# Altium PCB PCB1.PcbDoc (part 2 of 2)
Units mil, origin at the board's own origin, x right, y up, seen from the top; angles counter-clockwise.
Board outline 4250 x 4500 mil, 2 copper layers (Top Layer, Bottom Layer); 112 components, 121 nets, 412 pads, 86 vias.
Unrouted connection lines stored in the file: 20.
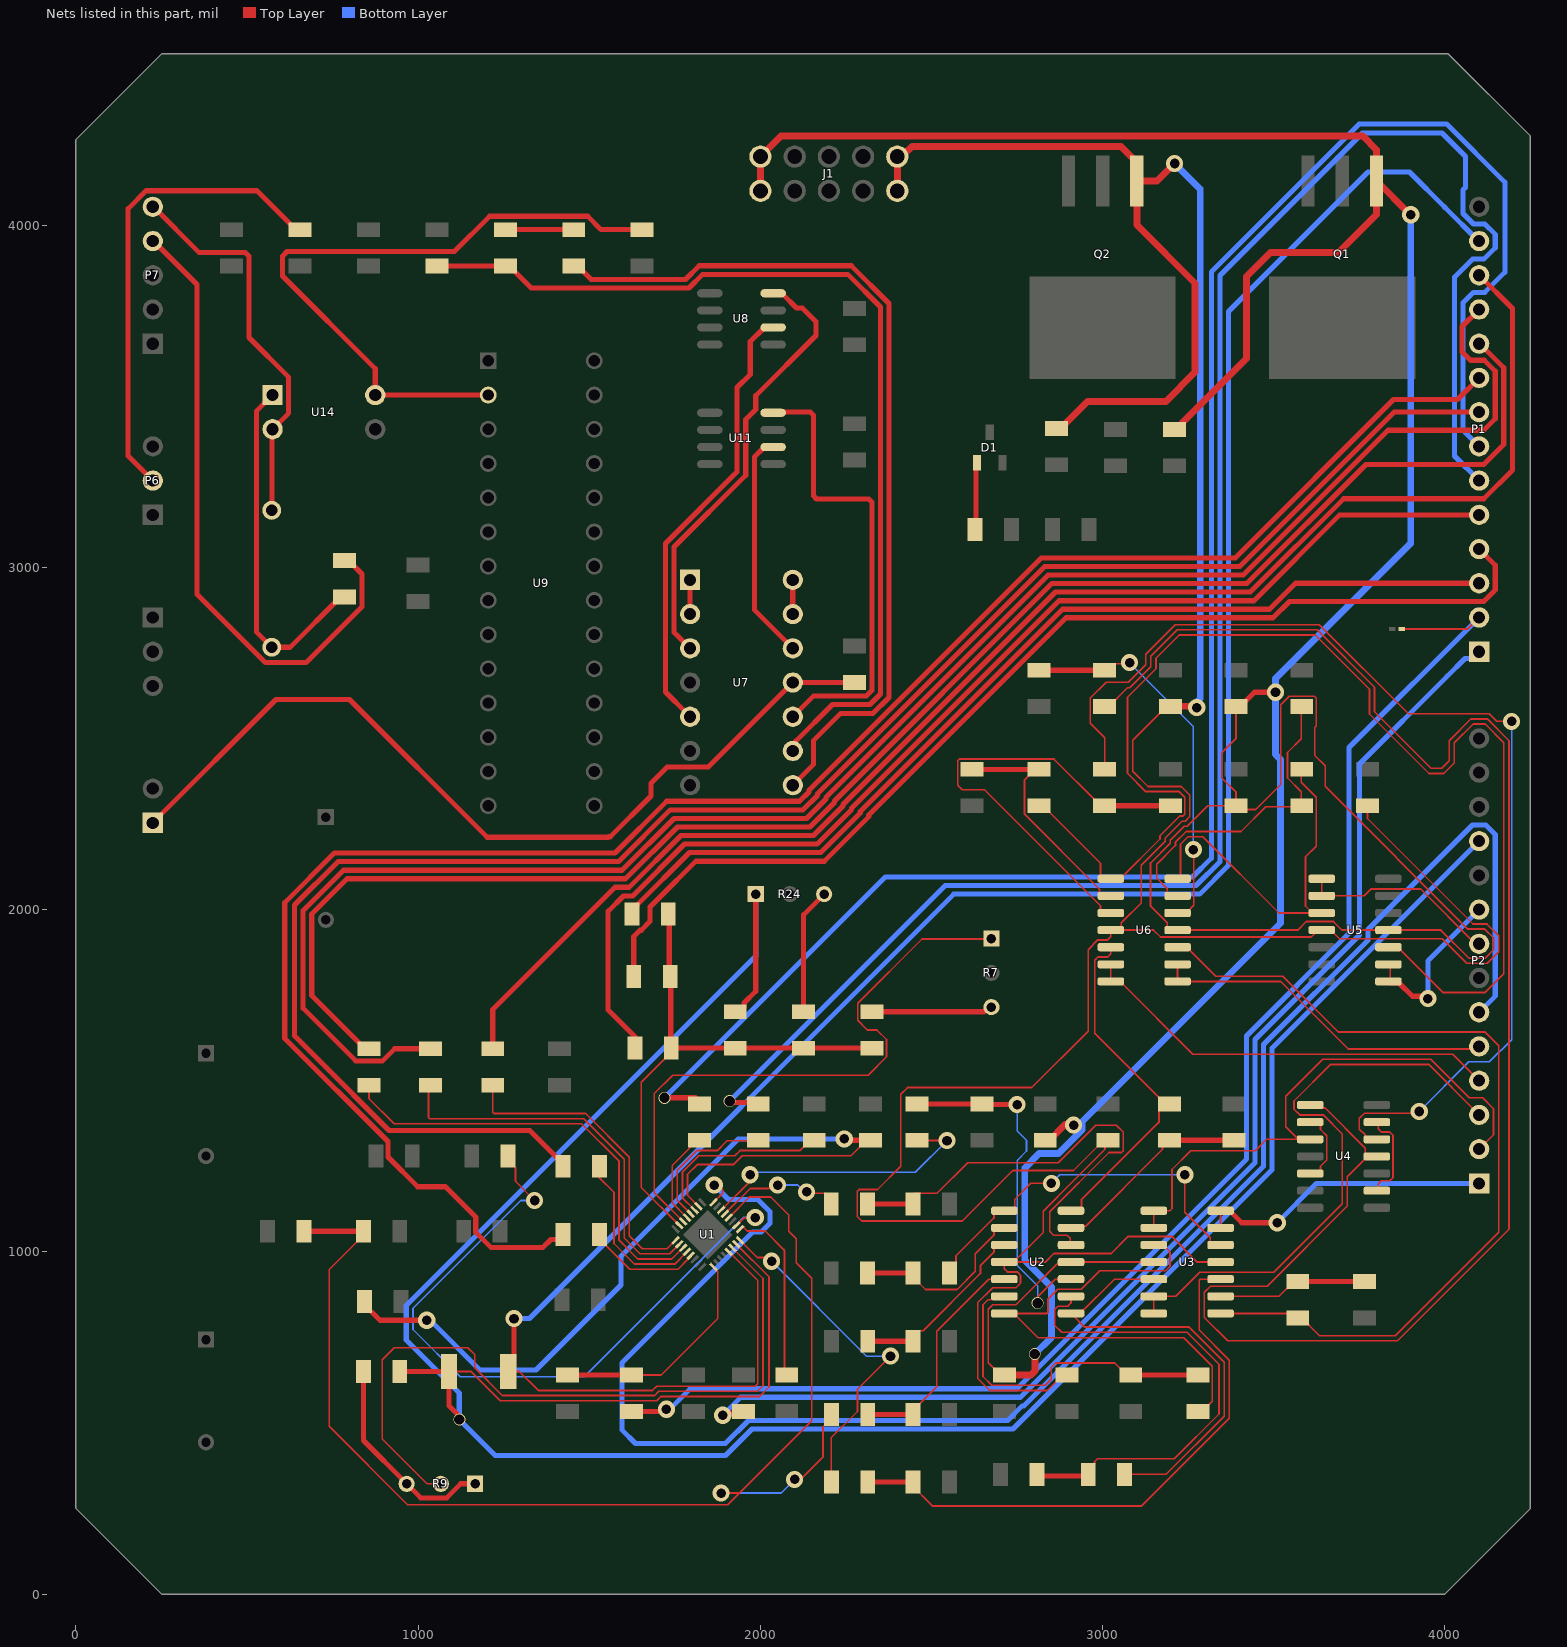
[diagram p2: the nets of this part, all layers, seen from the top]

## Via types
v1: diameter 50, hole 28, Top Layer to Bottom Layer, 79 vias
v2: diameter 35, hole 30, Top Layer to Bottom Layer, 7 vias

## Nets (pads, with @x,y where several pads share a name; then routed paths per layer and width w, separated by ;. In a path a pad name is that pad's centre, name@x,y a point inside that pad or via, vN(x,y) a via of type N, cw(c..) or ccw(c..) an arc to the next point about the centre after c; other vN are vias at no path point) (continued)
NetC9_2: C9.2 P1.1 | length 3702.8
  Top Layer w15: v1(1890,522.5) 1895.6,528.1 1944.89,528.1 C9.2@1950.49,533.7
  Bottom Layer w15: v1(1890,522.5) 1942.5,575 2759.64,575 3445,1260.36 3445,1620.36 3750,1925.36 3750,2425.1 4006.87,2681.98 4006.98,2681.98 4058.75,2733.75 4080.37,2733.75 P1.1@4100,2753.38
NetC10_1: C10.1 R13.2 U1.17 | length 666.8
  Top Layer w5: C10.1@1622.69,640 1710,640 1875,805 1875,942.42 1862.72,954.7 U1.17@1862.72,955.63
  Top Layer w15: R13.2@1435.83,640 C10.1@1626.3,640
NetC10_2: C10.2 P1.2 W1.2 | length 4209.4
  Top Layer w5: v1@1701.3,533.7 1718.7,533.7 v1(1725,540) ; W1.2@3873.78,2820 4066.62,2820 4090,2843.38 P1.2@4090,2860
  Top Layer w15: C10.2@1622.69,533.7 v1@1701.3,533.7
  Bottom Layer w15: v1(1725,540) 1735,540 1795,600 2749.29,600 3420,1270.71 3420,1630.71 3720,1930.71 3720,2473.38 P1.2@4100,2853.38
NetC13_2: C13.2 C18.2 C20.2 C22.2 C24.2 J1.1 J1.2 Q1.1 U2.11 U3.11 U5.11 U6.11 | length 11651.2
  Top Layer w5: C18.2@2700,650 2691.43,650 2665.28,676.15 2665.28,831.87 2678.41,845 2746.71,845 2770,868.29 2865.71,964 2901.44,964 U2.11@2907.44,970 ; U2.11@2925,970 U3.11@3149.51,970 ; U6.11@3210,1940 3197.49,1940 3188.44,1949.05 3188.44,1961.22 3140,2009.66 3140,2136.1 3197.5,2193.6 3197.5,2202.96 3237.82,2243.28 3247.18,2243.28 3307.34,2303.44 C24.2@3389.77,2303.44 3401.01,2292.19 3446.93,2292.19 3520,2365.26 3520,2598.22 3544.79,2623.01 3618.76,2623.01 3623.74,2618.03 3623.74,2535.88 3620,2532.15 3620,2450 3650,2420 3650,2360.07 4067.1,1942.97 4116.46,1942.97 4142.03,1917.41 4142.03,1882.59 4117.41,1857.97 4070.32,1857.97 3988.3,1940 U5.11@3834.88,1940 ; U6.11@3218.81,1940 3570,1940 3595,1965 3674.15,1965 3699.15,1940 U5.11@3820,1940 ; C22.2@3389.77,2592.86 3389.77,2500.11 3347.81,2458.15 3347.81,2384.56 3389.77,2342.6 3389.77,2310.23 C24.2@3390,2310
  Top Layer w15: C22.2@3389.77,2592.86 3401.58,2592.86 3443.73,2635 v1(3505,2635)
  Top Layer w20: J1.1@2000,4100 J1.2@2000,4200 2060,4260 3760,4260 3800,4220 Q1.1@3800,4183.46 ; C18.2@2713.24,640 2790.78,640 2802.5,651.72 2802.5,700.72 v2(2801.51,701.71) ; C20.2@2832.08,1325.94 2843.89,1325.94 2890,1372.05 ; C13.2@3210,3403.15 3221.81,3403.15 3233.46,3414.8 3233.46,3423.46 3420,3610 3420,3850 3490,3920 3688.76,3920 3800,4031.24 Q1.1@3800,4120 ; Q1.1@3800,4128.35 Q1.1@3800,4183.46 ; v1(3900,4030) 3899.49,4030 3800,4129.49 Q1.1@3800,4183.46
  Bottom Layer w20: v2(2801.51,701.71) 2850,750.21 2850,897.09 2772.5,974.59 2772.5,1245.53 2814.22,1287.25 2871.39,1287.25 2940,1355.86 2940,1370 ; v1(2915,1370) 2940,1370 ; v1@3501.88,2640 3505,2643.12 3505,2675 3900,3070 v1(3900,4030) ; v1(3505,2635) 3505,2453.64 3520,2438.64 3520,1960 2940,1380 2940,1370
NetC14_2: C14.2 C17.2 C19.2 C21.2 C23.2 J1.9 J1.10 Q2.1 U2.4 U3.4 U5.4 U6.4 | length 10650.6
  Top Layer w5: C17.2@2885,638.42 2881.84,638.42 2838.27,594.85 2670.04,594.85 2635.28,629.61 2635.28,851.87 2678.41,895 2746.71,895 2759.84,908.13 2759.84,931.87 2750.43,941.28 2721.97,941.28 2712.56,950.69 U2.4@2712.56,970 U2.4@2739.53,970 ; C21.2@3190,2596.9 3087.5,2494.4 3087.5,2404.47 3132.27,2359.69 3229.87,2359.69 3254.74,2334.82 3254.74,2272.05 3240.97,2258.28 3231.61,2258.28 3182.5,2209.17 3182.5,2199.81 3112.46,2129.77 3112.46,2019.37 3054.31,1961.22 3054.31,1949.05 U6.4@3045.26,1940 ; U3.4@3344.39,970 3276.53,970 3201.53,1045 3075.16,1045 3025.16,995 2856.79,995 2831.79,970 U2.4@2739.53,970 ; U5.4@3640,1950 3609.69,1919.69 3168.96,1919.69 3148.65,1940 U6.4@3045.26,1940 ; U5.4@3666.97,1940 3691.97,1915 3992.08,1915 4064.11,1842.97 4123.62,1842.97 4157.03,1876.38 4157.03,1923.62 4122.68,1957.97 4082.03,1957.97 3773.77,2266.23 C23.2@3773.77,2303.44 ; U2.4@2739.53,970 2825.93,1056.41 2825.93,1118.86 2914.9,1207.82 3006.79,1299.71 3006.79,1326.79 3008.69,1328.69 3010,1330 3007.39,1330 3005.48,1328.09 2914.89,1237.5 2737.5,1237.5 2590,1090 2296.01,1090 2283,1103.01 2283,1176.99 2287.98,1181.96 2341.96,1181.96 2410,1250 2410,1460 2430,1480 2793.03,1480 2957.5,1644.47 2957.5,1882.72 2986.06,1911.28 3014.52,1911.28 3023.93,1920.69 U6.4@3023.93,1940 U6.4@3045.26,1940
  Top Layer w20: J1.9@2400,4100 J1.10@2400,4190 ; J1.10@2400,4200 2412.17,4200 2429.59,4217.42 2430.94,4217.42 2443.52,4230 3053.46,4230 3100,4183.46 Q2.1@3100,4140 ; C14.2@2865.13,3406.06 2876.94,3406.06 2955.69,3484.81 3184.81,3484.81 3270,3570 3270,3830 3100,4000 Q2.1@3100,4128.35 3158.35,4128.35 v1@3200,4170 ; C21.2@3197.77,2592.86 3199.18,2594.27 3270.73,2594.27 v1(3275,2590)
  Bottom Layer w20: v1(3210,4180) 3285,4105 3285,2616.72 3280.74,2612.46 3280.74,2595.74 v1(3275,2590)
NetC15_1: C15.1 U1.4 | length 416.8
  Top Layer w5: U1.4@1796.47,1110.97 1757.01,1150.42 1757.01,1238.81 1813.99,1295.78 1874.13,1295.78 1902.44,1324.09 1991.7,1324.09 C15.1@1993.55,1325.94
NetC15_2: C15.2 P1.6 | length 5543.1
  Top Layer w15: v2(1910,1440) 1913.83,1436.17 1986.17,1436.17 C15.2@1990,1440
  Bottom Layer w15: v2(1910,1440) 2540,2070 3272.96,2070 3342.5,2139.54 3342.5,3852.5 3758.79,4268.79 3991.21,4268.79 4060,4200 4060,4110 4052.97,4102.97 4052.97,4033.9 4083.49,4003.38 4116.51,4003.38 4147.03,3972.86 4147.03,3933.9 4113.53,3900.41 4080.52,3900.41 4027.97,3847.86 4027.97,3325.41 P1.6@4100,3253.38
NetC16_1: C16.1 U1.5 | length 282.1
  Top Layer w5: U1.5@1785.33,1099.83 1742.01,1143.15 1742.01,1252.01 1819.09,1329.09 C16.1@1822.01,1329.09
NetC16_2: C16.2 P1.7 | length 5686.5
  Top Layer w15: v2(1720,1450) 1810,1450 C16.2@1830,1430
  Bottom Layer w15: v2(1720,1450) 2365,2095 3262.6,2095 3317.5,2149.9 3317.5,3862.86 3749.64,4295 4005,4295 4175,4125 4175,3861.87 4116.51,3803.38 4083.49,3803.38 4052.97,3772.86 4052.97,3400.41 P1.7@4100,3353.38
NetD1_2: D1.3 R25.1 | length 187
  Top Layer w15: R25.1@2630,3120 2629.72,3120.28 2629.72,3302.83 D1.3@2632.6,3305.71
NetD2_1: D2.1 P7.5 U14.2 | length 1153.3
  Top Layer w15: P7.5@224.53,4053.38 226.39,4053.38 360.39,3919.39 495.24,3919.39 505.49,3909.13 505.49,3671.58 621.56,3555.52 621.56,3450.41 U14.2@574.53,3403.38 573.33,3402.18 D2.1@573.33,3164.58
NetD2_2: D2.2 R60.2 U14.1 | length 1047.3
  Top Layer w15: D2.2@572.13,2766.53 527.07,2811.59 527.07,3455.92 U14.1@574.53,3503.38 ; D2.2@574.53,2763.38 577.68,2766.53 625.87,2766.53 772.72,2913.38 R60.2@784.53,2913.38
NetP1_3: P1.3 R17.1 | length 2885.7
  Top Layer w15: R17.1@1624.42,1986.61 1624.42,1998.43 1638.57,2012.58 1792.34,2166.35 2176.14,2166.35 2291.56,2281.77 2291.56,2286.51 2882.55,2877.5 3487.5,2877.5 3563.38,2953.38 P1.3@4100,2953.38
NetP1_4: P1.4 R19.1 | length 3219.1
  Top Layer w15: R19.1@1630,1805 1630,1921.21 1648.44,1939.65 1651.66,1939.65 1677.56,1965.55 1677.56,2007.68 1703.47,2033.58 1811.24,2141.35 2186.5,2141.35 2316.56,2271.41 2316.56,2276.15 2892.91,2852.5 3497.86,2852.5 3545.76,2900.41 4113.53,2900.41 4147.03,2933.9 4147.03,3006.35 P1.4@4100,3053.38
NetP1_5: P1.5 R21.1 | length 3451.4
  Top Layer w15: R21.1@1633.15,1595 1633.15,1628.46 1555,1706.61 1555,1995 1600,2040 1626.78,2040 1778.13,2191.35 2165.79,2191.35 2266.56,2292.13 2266.56,2296.86 2872.2,2902.5 3441.79,2902.5 3692.67,3153.38 4086.62,3153.38 P1.5@4090,3150
NetP1_8: P1.8 R14.1 | length 5385.1
  Top Layer w15: R14.1@1423.15,1250 1423.15,1261.81 1409,1275.96 1404.04,1275.96 1325.91,1354.09 914.85,1354.09 809.33,1459.61 809.33,1460.67 638.88,1631.12 638.88,2013.52 765.36,2140 1585.36,2140 1736.71,2291.35 2124.36,2291.35 2166.56,2333.55 2166.56,2338.28 2830.77,3002.5 3400.37,3002.5 3851.25,3453.38 4083.38,3453.38 P1.8@4090,3460
NetP1_9: P1.9 R15.1 | length 5658.4
  Top Layer w15: R15.1@1423.15,1050 1409.44,1036.29 1387.78,1036.29 1364.53,1013.04 1212.2,1013.04 1168.3,1056.94 1168.3,1101.7 1080,1190 998.39,1190 911.45,1276.94 911.45,1322.13 610,1623.58 610,2020 755,2165 1575,2165 1726.35,2316.35 2114.01,2316.35 2141.56,2343.9 2141.56,2348.64 2820.42,3027.5 3387.5,3027.5 3850,3490 4036.62,3490 P1.9@4100,3553.38
NetP1_10: P1.10 R16.1 | length 4843.7
  Top Layer w15: R16.1@856.3,1593.15 844.49,1593.15 688.88,1748.76 688.88,1987.03 791.84,2090 1606.07,2090 1757.42,2241.35 2145.07,2241.35 2216.56,2312.84 2216.56,2317.57 2851.48,2952.5 3421.08,2952.5 3768.99,3300.41 4113.53,3300.41 4172.03,3358.9 4172.03,3583.22 P1.10@4104.83,3650.41
NetP1_11: P1.11 R18.1 | length 5221.2
  Top Layer w15: R18.1@1036.3,1593.15 931.37,1593.15 896.21,1558 817.24,1558 663.88,1711.36 663.88,1997.39 781.49,2115 1595.71,2115 1747.06,2266.35 2134.72,2266.35 2191.56,2323.19 2191.56,2327.93 2841.13,2977.5 3410.72,2977.5 3833.63,3400.41 4113.53,3400.41 4147.03,3433.9 4147.03,3572.86 4114.89,3605 4075,3605 4050,3630 4050,3703.38 P1.11@4100,3753.38
NetP1_12: P1.12 R20.1 | length 4359.2
  Top Layer w15: R20.1@1217.81,1593.15 1217.81,1707.81 1575,2065 1616.42,2065 1767.77,2216.35 2155.43,2216.35 2241.56,2302.48 2241.56,2307.22 2861.84,2927.5 3431.43,2927.5 3704.34,3200.41 4113.53,3200.41 4197.03,3283.9 4197.03,3756.35 P1.12@4100,3853.38
NetP1_13: P1.13 R2.1 U1.21 | length 6583.2
  Top Layer w5: R2.1@1262.91,650 1296.1,650 1351.1,595 1363.79,595 1363.94,594.85 1684.39,594.85 1697.04,607.5 1985.13,607.5 1992.5,614.87 1992.5,915.99 1908.32,1000.17 U1.21@1907.27,1000.17
  Top Layer w15: R2.1@1262.91,650 1280,667.09 v1(1280,805)
  Bottom Layer w15: v1(1280,805) 1325,805 2565,2045 3283.31,2045 3367.5,2129.19 3367.5,3747.6 3774.9,4155 3896.52,4155 3999.59,4051.93 4098.14,3953.38 P1.13@4100,3953.38
NetP2_1: P2.1 U3.6 U3.7 | length 862.1
  Top Layer w5: U3.6@3344.39,1070 U3.7@3344.39,1120
  Top Layer w15: U3.7@3350,1120 3371.36,1120 3406.36,1085 v1(3510,1085)
  Bottom Layer w15: v1(3510,1085) 3625,1200 P2.1@4100,1200
NetP2_2: P2.2 U3.8 U3.9 U4.3 | length 1648.2
  Top Layer w5: U3.9@3149.51,1070 3149.51,1119.51 U3.8@3150,1120 ; U3.8@3149.51,1120 U3.8@3150,1120 ; U4.3@3606.23,1328.69 U4.3@3571.31,1328.69 ; P2.2@4100,1300 4142.03,1342.03 4142.03,1417.97 4110,1450 4071.21,1450 3958.71,1562.5 3642.5,1562.5 3535,1455 3535,1365 U4.3@3571.31,1328.69 ; U3.8@3150,1120 3195.79,1120 3202.5,1126.71 3202.5,1240.53 3257.56,1295.6 3445.52,1295.6 3478.61,1328.69 U4.3@3571.31,1328.69
NetP2_3: P2.3 U3.13 U3.14 | length 1742.6
  Top Layer w5: U3.13@3147.26,867.74 3149.51,865.49 U3.14@3149.51,820 ; U3.13@3149.51,870 3213.83,870 3283.83,940 3305.24,940 3305.55,940.31 3383.23,940.31 3383.55,940 3500,940 3700,1140 3700,1344.08 3644.08,1400 3575.77,1400 3558.95,1416.82 3558.95,1440.57 3665.88,1547.5 3952.5,1547.5 P2.3@4090,1410
NetP2_4: P2.4 U6.6 U6.7 | length 1240.9
  Top Layer w5: U6.7@3021.97,1791.97 3023.93,1793.93 U6.6@3023.93,1840 ; U6.7@3023.93,1790 3050.9,1790 3263.4,1577.5 4022.5,1577.5 4090,1510 P2.4@4090,1500
NetP2_5: P2.5 U6.8 U6.9 | length 1004.5
  Top Layer w5: U6.8@3218.81,1790 3520,1790 3717.5,1592.5 4097.5,1592.5 P2.5@4100,1590 ; U6.9@3218.81,1840 3218.81,1801.18 U6.8@3220,1800
NetP2_6: P2.6 U1.32 | length 5196.1
  Top Layer w5: U1.32@1862.72,1144.37 1863.02,1144.37 1890,1171.35 1890,1177.93 ; v1(1865,1195) 1875,1195 1890,1180
  Bottom Layer w15: v1(1865,1195) 1907.05,1152.95 1992.15,1152.95 2027.5,1117.6 2027.5,1082.4 2002.6,1057.5 1977.5,1057.5 1595,675 1595,480 1635,440 1897.28,440 1964.78,507.5 2722.5,507.5 2765,550 2770,550 3470,1250 3470,1605.36 3775,1910.36 3775,1941.51 4080.52,2247.03 4119.48,2247.03 4147.03,2219.48 4147.03,1747.03 P2.6@4100,1700
NetP2_8: P2.8 U5.1 U5.2 | length 574.8
  Top Layer w5: U5.1@3640,2090 U5.2@3640,2040 3764.72,2040 3785.03,2060.31 3928.54,2060.31 4088.86,1900 P2.8@4090,1900
NetP2_9: P2.9 U5.8 U5.9 | length 500.1
  Top Layer w5: U5.9@3834.88,1840 3840,1834.88 U5.8@3840,1800
  Top Layer w15: U5.8@3834.88,1790 3839.19,1785.69 3866.16,1785.69 3905.15,1746.7 3943.3,1746.7 v1(3950,1740)
  Bottom Layer w15: v1(3950,1740) 3950,1850 P2.9@4100,2000
NetP2_11: P2.11 R2.2 R5.2 R22.2 R24.1 U1.23 | length 8113.8
  Top Layer w5: R2.2@1089.68,650 1154.88,650 1239.88,565 1351.36,565 1351.51,564.85 1696.81,564.85 1709.47,577.5 1997.56,577.5 2025,604.94 2025,926.98 U1.23@1929.54,1022.44
  Top Layer w15: R5.2@946.3,650 R2.2@1086.3,650 ; R2.2@1089.68,650 1089.68,550.32 v2@1130,510 ; R22.2@1926.3,1701.3 1938.11,1701.3 1952.26,1715.45 1952.26,1727.26 1986.3,1761.3 R24.1@1986.3,2045
  Bottom Layer w15: R24.1@1986.3,2045 1986.3,1864.58 965,843.28 965,742.45 1120,587.45 v2(1120,510) 1225,405 1897.63,405 1975.13,482.5 2737.86,482.5 3495,1239.64 3495,1595 P2.11@4100,2200
NetP7_4: P7.4 R60.1 | length 1883.6
  Top Layer w15: P7.4@224.53,3953.38 226.39,3953.38 353.56,3826.21 353.56,2921.37 553.46,2721.47 672.49,2721.47 835.49,2884.48 835.49,2980.53 792.64,3023.38 R60.1@784.53,3023.38
NetR1_2: R1.2 U1.26 | length 2024.1
  Top Layer w5: R1.2@1262.6,1280 1262.6,1268.19 1284.25,1246.54 1284.25,1205.75 v1(1340,1150) ; U1.26@1929.54,1077.56 1930.6,1077.56 1952.5,1099.47 1984.47,1099.47 v1(1985,1100)
  Bottom Layer w5: v1(1340,1150) 1300,1150 985,835 985,772.93 1122.93,635 1485,635 1950,1100 v1(1985,1100)
NetR3_1: R3.1 R6.2 R38.1 U1.28 | length 3879.1
  Top Layer w5: R3.1@840,1060 840,1048.19 740,948.19 740,490 968.93,261.07 1904.85,261.07 2013.79,370 ; v1(1885,295) 1938.79,295 2013.79,370 ; U1.28@1907.27,1099.83 1967.43,1160 2030,1160 2082.5,1107.5 2082.5,1060.53 2105,1038.03 2105,968 2150,923 2150,506.21 2013.79,370 ; v1(2100,335) 2118.03,335 2182.5,399.47 2182.5,487.92 2207.31,512.73 R38.1@2207.31,524.54
  Top Layer w15: R6.2@666.3,1060 826.3,1060 R3.1@836.3,1050
  Bottom Layer w5: v1(1885,295) 2060,295 v1(2100,335)
NetR4_1: R4.1 R8.2 U1.2 | length 2569.5
  Top Layer w5: U1.2@1818.74,1133.24 1787.01,1164.96 1787.01,1226.39 1815.5,1254.87 1920.63,1254.87 1946.54,1280.78 2264.81,1280.78 2309.96,1325.94 R8.2@2321.77,1325.94
  Top Layer w15: R4.1@843.15,855 838.15,850 888.15,800 v1(1025,800) ; v1(2245,1330) 2249.06,1325.94 2309.96,1325.94 R8.2@2321.77,1325.94
  Bottom Layer w15: v1(1025,800) 1035,800 1180,655 1344.5,655 1592.26,902.76 1592.26,987.26 1935,1330 v1@2230,1330
NetR5_1: R5.1 R9.1 R9.3 | length 611.5
  Top Layer w15: R5.1@840,650 840,448.57 963.57,325 R9.3@965,325 ; R9.3@966.38,322.19 1007.5,281.07 1083.41,281.07 1124.53,322.19 1162.19,322.19 R9.1@1165,325
NetR7_1: R7.1 U1.6 | length 1807.9
  Top Layer w5: U1.6@1774.2,1088.7 1690,1172.89 1690,1462.43 1743.7,1516.13 2314.56,1516.13 2368.26,1569.83 2368.26,1620.17 2340.29,1648.15 2312.31,1648.15 2284.33,1676.12 2284.33,1726.47 2471.95,1914.09 2674.09,1914.09 R7.1@2675,1915
NetR7_3: R7.3 R10.2 | length 354.4
  Top Layer w15: R10.2@2326.3,1701.3 2652.57,1701.3 2666.27,1715 R7.3@2675,1715
NetR9_2: R9.2 U1.22 | length 2116.9
  Top Layer w5: R9.2@1066.38,322.19 1025.74,322.19 897.93,450 895,452.93 895,685 930,720 1145,720 1165,700 1165,661.09 1246.09,580 1357.57,580 1357.73,579.85 1690.6,579.85 1703.25,592.5 1991.34,592.5 2007.5,608.66 2007.5,922.21 U1.22@1918.4,1011.3
NetR10_1: R10.1 R17.2 R19.2 R21.2 R22.1 R23.1 U1.7 | length 1583
  Top Layer w5: R21.2@1739.45,1595 1737.87,1593.43 1737.87,1581.61 1652.01,1495.75 1652.01,1187.99 1762.44,1077.56 U1.7@1763.06,1077.56
  Top Layer w15: R17.2@1730.71,1986.61 1733.51,1983.82 1733.51,1807.79 1737.87,1803.43 R21.2@1737.87,1593.43 ; R21.2@1739.45,1595 R22.1@1926.3,1595 R23.1@2126.3,1595 R10.1@2326.3,1595
NetR11_2: R11.2 U1.3 | length 549
  Top Layer w5: U1.3@1807.6,1122.1 1772.01,1157.69 1772.01,1232.6 1820.2,1280.78 1925.32,1280.78 1940.32,1295.78 2115.13,1295.78 2145.29,1325.94 R11.2@2157.1,1325.94
NetR12_2: R12.2 U1.25 | length 527.2
  Top Layer w5: U1.25@1940.67,1066.43 1946.81,1072.57 1949.4,1072.57 1961.36,1060.61 2014.39,1060.61 2068.54,1006.46 cw(c2065,1002.93) 2070,1002.93 2070,974.65 ccw(c2075,974.65) 2070.01,974.39 cw(c2032.56,972.45) 2070.01,970.51 ccw(c2075,970.25) 2070,970.25 2070,648.86 ccw(c2075,648.86) 2071.46,645.32 R12.2@2076.78,640
NetR14_2: R14.2 U1.12 | length 496.7
  Top Layer w5: R14.2@1529.45,1250 1529.45,1216.54 1572.01,1173.97 1572.01,1024.09 1632.01,964.09 1749.25,964.09 U1.12@1785.33,1000.17
NetR15_2: R15.2 U1.13 | length 333.8
  Top Layer w5: R15.2@1529.45,1050 1529.45,1038.19 1618.55,949.09 1759.09,949.09 1789.36,979.36 1789.36,981.92 U1.13@1796.47,989.03
NetR16_2: R16.2 U1.11 | length 1299.4
  Top Layer w5: R16.2@856.3,1486.85 856.3,1447.34 929.55,1374.09 1477.01,1374.09 1587.01,1264.09 1587.01,1034.09 1642.01,979.09 1740.92,979.09 1773.14,1011.3 U1.11@1774.2,1011.3
NetR18_2: R18.2 U1.10 | length 1141.8
  Top Layer w5: R18.2@1036.3,1486.85 1030,1480.55 1030,1392.02 1032.93,1389.09 1483.23,1389.09 1602.01,1270.3 1602.01,1040.3 1648.23,994.09 1734.71,994.09 U1.10@1763.06,1022.44
NetR20_2: R20.2 U1.9 | length 923.6
  Top Layer w5: R20.2@1217.81,1486.85 1217.81,1407.02 1220.74,1404.09 1489.44,1404.09 1617.01,1276.51 1617.01,1046.51 1654.44,1009.09 1727.01,1009.09 1751.5,1033.57 U1.9@1751.93,1033.57
NetR23_2: R23.2 R24.3 | length 368.6
  Top Layer w15: R23.2@2126.3,1701.3 2126.3,1985 R24.3@2186.3,2045
NetR26_2: R26.2 R27.1 U2.13 | length 581.1
  Top Layer w5: U2.13@2907.44,1070 2912.53,1075.09 2950.09,1075.09 3174.71,1299.71 3174.71,1306.78 3192.93,1325 R27.1@3195,1325
  Top Layer w15: R27.1@3195.28,1325.94 R26.2@3379.06,1325.94
NetR27_2: R27.2 U2.14 U6.5 | length 1031.3
  Top Layer w5: U2.14@2907.44,1120 2928.76,1120 2937.82,1129.05 2937.82,1151.6 3164.32,1378.1 3164.32,1413.08 R27.2@3189.37,1438.14 ; U6.5@3023.93,1890 3023.93,1870.69 3014.52,1861.28 2986.06,1861.28 2976.65,1851.87 2976.65,1639.05 3175.71,1440 R27.2@3190,1440 ; R27.2@3190.62,1439.38 R27.2@3191.23,1440
NetR28_2: R28.2 R29.1 U2.6 | length 984.9
  Top Layer w5: U2.6@2712.56,870 2683.75,870 2673.75,860 2665,860 2650.28,845.28 2650.28,635.82 2676.26,609.85 2832.06,609.85 2850,627.79 2850,661.91 2863.09,675 3035.18,675 3065.18,645 R28.2@3080,645
  Top Layer w15: R28.2@3081.99,640 R29.1@3285,640
NetR29_2: R29.2 U2.7 U3.10 | length 1484.4
  Top Layer w5: U2.7@2712.56,820 U2.7@2739.53,820 ; U3.10@3130,1025 3171.48,1025 3196.79,999.69 3196.79,958.13 3183.66,945 2991.59,945 2936.9,890.31 2868.6,890.31 2840,861.71 2840,822.93 2837.07,820 U2.7@2739.53,820 ; R29.2@3281.69,525 3320.55,563.85 3320.55,665.17 3237.08,748.64 2810.89,748.64 U2.7@2739.53,820
NetR30_2: R30.2 R31.1 U2.9 | length 1397.6
  Top Layer w5: U2.9@2907.44,870 2907.44,850.69 2898.03,841.28 2869.57,841.28 2860.16,831.87 2860.16,784.84 2880,765 3246.21,765 3340,671.21 3340,526.21 3208.79,395 2985,395 2976.07,386.07 2976.07,379.7 2961.37,365 R31.1@2955,365
  Top Layer w15: R30.2@2807.73,348.73 2811.46,345 R31.1@2955,345
NetR31_2: R31.2 U2.8 U3.12 | length 1317.9
  Top Layer w5: R31.2@3055,350 3185,350 3355,520 3355,677.43 3252.43,780 2947.44,780 U2.8@2907.44,820 2934.41,820 3034.41,920 U3.12@3149.51,920
NetR32_2: R32.2 R33.1 U2.2 | length 547
  Top Layer w5: R33.1@2445,950 2445,927.45 2482.45,890 2575,890 2627.77,942.77 2627.77,994.36 2682.18,1048.78 2682.18,1060.95 2691.24,1070 U2.2@2712.56,1070
  Top Layer w15: R32.2@2313.15,938.58 2433.58,938.58 R33.1@2440,945
NetR33_2: R33.2 U2.1 U3.5 | length 1098
  Top Layer w5: R33.2@2550,940 2571.13,961.13 2571.13,987.73 2682.18,1098.78 2682.18,1110.95 2691.24,1120 U2.1@2712.56,1120 ; U2.1@2720,1120 2733.88,1120 2742.93,1129.05 2742.93,1152.93 2790,1200 v1(2850,1200) ; v1(3240,1225) 3240,1115.24 3314.02,1041.22 3314.02,1029.05 3323.07,1020 U3.5@3344.39,1020
  Bottom Layer w5: v1(2850,1200) 2875,1225 v1(3240,1225)
NetR34_2: R34.2 R35.1 U3.2 | length 433.5
  Top Layer w5: U3.2@3344.39,870 3515.04,870 3555.04,910 R35.1@3560,910
  Top Layer w15: R35.1@3570,913.15 R34.2@3765.45,913.15 3766.85,913.15 R34.2@3770,910
NetR35_2: R35.2 U3.1 U6.10 | length 2575.8
  Top Layer w5: U6.10@3218.81,1890 3245.78,1890 3330.78,1805 3526.21,1805 3689.19,1642.03 4117.41,1642.03 4157.03,1602.41 4157.03,1057.03 3855,755 3633.66,755 3578.66,810 3565,810 3555,820 U3.1@3344.39,820 ; R35.2@3569.07,805.93 R35.2@3575,800
NetR36_2: R36.2 R37.2 U2.3 | length 528.9
  Top Layer w5: R37.2@2440,755 2454.51,769.51 2475.73,769.51 2642.77,936.56 2642.77,959.36 2682.18,998.78 2682.18,1010.95 2691.24,1020 U2.3@2712.56,1020
  Top Layer w15: R36.2@2313.61,738.55 R37.2@2439.75,738.55
NetR38_2: R38.2 R39.2 U2.5 | length 662.1
  Top Layer w5: R39.2@2430,540 2449.79,540 2515,605.21 2515,768.25 2590.92,844.16 2666.75,920 U2.5@2712.56,920
  Top Layer w15: R38.2@2313.61,524.54 R39.2@2440.23,524.54
NetR40_1: R40.1 U1.24 | length 1018.8
  Top Layer w5: U1.24@1940.67,1033.57 1962.12,1012.12 1969.16,1005.08 1991.06,983.19 2021.82,983.19 v1(2032.56,972.45) ; R40.1@2207.31,327.27 2207.31,457.4 2283.46,533.55 2283.46,598.46 v1(2380,695)
  Bottom Layer w5: v1(2032.56,972.45) 2310.01,695 v1(2380,695)
NetR40_2: R40.2 R41.2 U3.3 | length 1683.6
  Top Layer w5: R41.2@2440,320 2502.5,257.5 3113.71,257.5 3370,513.79 3370,683.64 3282.11,771.53 3282.11,917.07 3285.04,920 U3.3@3344.39,920
  Top Layer w15: R40.2@2313.61,327.27 R41.2@2431.99,327.27
NetR42_1: R42.1 U1.30 | length 839.1
  Top Layer w5: U1.30@1885,1122.1 1885.68,1122.1 1970,1206.42 v1(1970,1225) ; R42.1@2465,1315 2475,1325 v1(2545,1325)
  Bottom Layer w5: v1(1970,1225) 1977.5,1232.5 2452.5,1232.5 v1(2545,1325)
NetR42_2: R42.2 R43.2 U2.10 | length 1051.1
  Top Layer w5: v2(2810,850) 2810,868.84 2861.16,920 U2.10@2900,920
  Top Layer w15: R42.2@2457.49,1432.24 R43.2@2647.52,1432.24 2649.75,1430 v1(2750,1430)
  Bottom Layer w5: v1(2750,1430) 2750,1353.03 2777.5,1325.53 2777.5,1294.47 2750,1266.97 2750,960 2810,900 v2(2810,850)
NetR44_1: R44.1 U1.29 | length 362.4
  Top Layer w5: U1.29@1896.13,1110.97 1970.16,1185 2024.57,1185 2025.96,1186.39 2041.39,1186.39 v1(2050,1195) ; v1(2135,1175) 2139.04,1170.96 2187.7,1170.96 2200,1158.66 R44.1@2200,1150
  Bottom Layer w5: v1(2050,1195) 2109.04,1195 2129.04,1175 v1(2135,1175)
NetR44_2: R44.2 R45.2 U2.12 | length 1333.6
  Top Layer w5: R45.2@2435,1155 2450.96,1170.96 2515.81,1170.96 2605.32,1260.48 2870.48,1260.48 2980,1370 3040,1370 3060,1350 3060,1295 3055,1290 3018.29,1290 2845,1116.71 2845,1060 2856.28,1048.72 2895.59,1048.72 2905,1039.31 2905,1022.44 U2.12@2907.44,1020
  Top Layer w15: R44.2@2313.15,1140 R45.2@2435,1140
NetR46_2: R46.2 R47.1 U6.2 | length 681.8
  Top Layer w5: R47.1@2800,2410 2800,2409.74 2800,2407.78 2771.81,2379.58 2771.81,2278.26 2990.76,2059.31 2990.76,2049.05 2999.81,2040 U6.2@3023.93,2040
  Top Layer w15: R46.2@2618.46,2409.74 R47.1@2800,2409.74
NetR47_2: R47.2 U5.10 U6.1 | length 3696.6
  Top Layer w5: R47.2@2813.77,2303.44 2825.58,2303.44 2993.56,2135.46 2993.56,2099.05 3002.61,2090 U6.1@3023.93,2090 3051.47,2090 3167.5,2206.03 3167.5,2215.39 3225.4,2273.28 3234.76,2273.28 3239.74,2278.26 3239.74,2328.61 3223.65,2344.69 3126.06,2344.69 3072.5,2398.25 3072.5,2620.07 3155.81,2703.38 3155.81,2733.84 3224.47,2802.5 3620.53,2802.5 3779.39,2643.64 3779.39,2571.36 3953.25,2397.5 3996.75,2397.5 4027.5,2428.25 4027.5,2486.94 4082.59,2542.03 4117.41,2542.03 4172.03,2487.41 4172.03,1812.59 4117.41,1757.97 3993.88,1757.97 3861.85,1890 U5.10@3834.88,1890
NetR48_1: R48.1 U4.12 | length 3251
  Top Layer w5: R48.1@3005.77,2409.74 3005.77,2502.48 2963.81,2544.44 2963.81,2618.03 3010.19,2664.41 3074.41,2664.41 3125.81,2715.81 3125.81,2746.27 3212.04,2832.5 3632.96,2832.5 3893.43,2572.03 4129.83,2572.03 4151.86,2550 v1(4195,2550) ; U4.12@3801.11,1328.69 3775.99,1328.69 3766.93,1337.75 3766.93,1341.55 3750,1358.48 3750,1390 3765,1405 v1@3930,1405
  Bottom Layer w5: v1(3925,1410) 4070,1555 4130,1555 4195,1620 v1(4195,2550)
NetR48_2: R48.2 R49.2 U6.3 | length 1355.5
  Top Layer w5: R48.2@2990,2300 2990,2307.4 2857.51,2439.89 2581.47,2439.89 2576.49,2434.91 2576.49,2363.51 2590,2350 2654.78,2350 2993.56,2011.22 2993.56,1999.05 3002.61,1990 U6.3@3023.93,1990
  Top Layer w15: R48.2@3005.77,2303.44 3193.44,2303.44 R49.2@3200,2310
NetR50_2: R50.2 R51.1 U6.13 | length 958.2
  Top Layer w5: U6.13@3218.81,2040 3197.49,2040 3188.44,2049.05 3188.44,2061.22 3157.56,2092.11 3157.56,2132.44 3212.5,2187.39 3212.5,2196.75 3244.04,2228.28 3404.23,2228.28 3475.95,2300 R51.1@3580,2300 ; R50.2@3580,2600 3580,2499.23 3539.81,2459.03 3539.81,2384.56 3580,2344.37 3580,2305.21 R51.1@3581.77,2303.44
NetR51_2: R51.2 U5.3 U6.14 | length 1077.7
  Top Layer w5: U6.14@3218.81,2090 3227.5,2098.68 3227.5,2190.53 3249.47,2212.5 3292.5,2212.5 3515,1990 U5.3@3613.03,1990 ; R51.2@3581.77,2409.74 3580,2407.97 3580,2372.35 3592.35,2360 3623.74,2328.61 3623.74,2184.97 3592.72,2153.95 3592.72,2010.31 U5.3@3613.03,1990 ; U5.3@3640,1990 3618.68,1990 U5.3@3613.03,1990
NetR52_1: R52.1 U4.1 U4.11 | length 5142.1
  Top Layer w5: R52.1@3005.77,2592.86 3017.58,2592.86 3072.49,2647.76 3078.98,2647.76 3140.81,2709.59 3140.81,2740.05 3218.25,2817.5 3626.75,2817.5 3794.39,2649.85 3794.39,2577.57 3959.47,2412.5 3990.53,2412.5 4012.5,2434.47 4012.5,2493.15 4076.38,2557.03 4123.62,2557.03 4187.03,2493.62 4187.03,1065.81 3861.21,740 3365.24,740 3297.11,808.13 3297.11,881.87 3314.93,899.69 3480.9,899.69 3715,1133.79 3715,1219.55 3770.45,1275 U4.11@3779.68,1275 ; U4.1@3606.23,1428.69 3635.04,1428.69 3643.73,1420 3650,1420 3767.28,1302.72 3767.28,1287.4 U4.11@3779.68,1275 ; U4.11@3801.11,1278.69 3783.37,1278.69 U4.11@3779.68,1275
NetR52_2: R52.2 R53.2 U6.12 | length 1097.2
  Top Layer w5: R52.2@3020,2700 3020,2701.57 3036.74,2718.31 3075.28,2718.31 v1(3078.48,2721.52) ; U6.12@3218.81,1990 3243.94,1990 3266.09,2012.15 3266.09,2173.91 v1(3265,2175)
  Top Layer w15: R53.2@2813.77,2699.15 R52.2@2999.15,2699.15
  Bottom Layer w5: v1(3078.48,2721.52) 3265,2535 3265,2530 v1(3265,2175)
NetR57_2: R57.2 R58.1 U7.9 | length 2832.1
  Top Layer w15: R57.2@1054.53,3880.23 1241.38,3880.23 R58.1@1244.53,3883.38 ; R58.1@1254.53,3880.23 1266.34,3880.23 1330.49,3816.08 1791.35,3816.08 1831.35,3856.08 2254.85,3856.08 2350.49,3760.43 2350.49,2630.05 2319.94,2599.5 2210.64,2599.5 2102.96,2491.81 U7.9@2102.96,2464.95
NetR58_2: R58.2 R59.1 | length 200
  Top Layer w15: R58.2@1254.53,3986.53 R59.1@1454.53,3986.53
NetU4_2: U4.2 U4.5 | length 223.1
  Top Layer w5: U4.5@3600,1225 3623.86,1225 3636.6,1237.75 3636.6,1249.92 3655,1268.31 3655,1339.08 3636.6,1357.47 3636.6,1369.64 3627.55,1378.69 U4.2@3606.23,1378.69
NetU4_9: U4.9 U4.13 | length 265
  Top Layer w5: U4.13@3801.11,1378.69 3805,1374.8 3805,1359.38 3814.41,1349.97 3838.98,1349.97 3848.39,1340.57 3848.39,1216.82 3838.98,1207.41 3814.41,1207.41 3805,1198 U4.9@3805,1180
NetU7_3: U7.3 U8.8 | length 1305.5
  Top Layer w15: U7.3@1794.53,2763.38 1747.5,2810.41 1747.5,3059.27 1956.91,3268.68 1956.91,3431.91 1986.15,3461.15 1986.15,3501.2 2162.5,3677.55 2162.5,3717.6 2122.32,3757.78 2105.63,3757.78 2065.46,3797.95 2039.87,3797.95 U8.8@2037.05,3800.77
NetU7_5: U7.5 U8.6 | length 1298.4
  Top Layer w15: U7.5@1784.53,2573.38 1722.5,2635.41 1722.5,3069.63 1931.91,3279.03 1931.91,3525.16 1970.28,3563.53 1970.28,3659.59 2008.64,3697.95 2034.23,3697.95 U8.6@2037.05,3700.77
NetU7_10: U7.10 U11.8 | length 1341.3
  Top Layer w15: U11.8@2044.73,3453.18 2070.39,3453.18 2070.59,3453.38 2146.21,3453.38 2155,3444.59 2155,3208.79 2163.79,3200 2316.71,3200 2325.49,3191.21 2325.49,2640.4 2309.59,2624.5 2155.64,2624.5 U7.10@2094.53,2563.38
NetU7_12: U7.12 U11.6 | length 660.7
  Top Layer w15: U11.6@2024.53,3353.38 2013.31,3353.38 1982.15,3322.22 1982.15,2875.76 U7.12@2094.53,2763.38
NOTE: R59.2 U7.8 | length 2578.7
  Top Layer w15: R59.2@1454.53,3880.23 1466.34,3880.23 1505.49,3841.08 1780.99,3841.08 1820.99,3881.08 2265.2,3881.08 2375.49,3770.79 2375.49,2619.69 2329.18,2573.38 2234.53,2573.38 2154.53,2493.38 2154.53,2423.38 U7.8@2094.53,2363.38
OP_AMP_V+: C25.2 P4.1 U7.11 | length 2564.8
  Top Layer w15: P4.1@224.53,2253.38 584.53,2613.38 799.63,2613.38 1201.73,2211.27 1554.42,2211.27 1555.73,2212.58 1561.16,2212.58 1680,2331.42 1680,2368.85 1727.5,2416.35 1847.5,2416.35 U7.11@2094.53,2663.38 2094.66,2663.52 C25.2@2264.39,2663.52
PITCH_BEND: U7.1 U7.2 | length 94.1
  Top Layer w15: U7.2@1784.53,2873.38 1794.53,2883.38 U7.1@1794.53,2963.38
RX0: R61.1 U9.2 U14.4 | length 1963.4
  Top Layer w15: U9.2@1204.53,3503.38 U14.4@874.53,3503.38 874.53,3580.36 603.56,3851.33 603.56,3909.13 616.81,3922.38 1105.6,3922.38 1208.91,4025.68 1495.24,4025.68 1534.4,3986.53 R61.1@1654.53,3986.53
TRIGGER: P6.2 R55.1 | length 1395.3
  Top Layer w15: P6.2@224.53,3253.38 152.5,3325.41 152.5,4047.86 205.05,4100.41 528.84,4100.41 642.72,3986.53 R55.1@654.53,3986.53
VELOCITY: U7.13 U7.14 | length 100
  Top Layer w15: U7.13@2094.53,2863.38 U7.14@2094.53,2963.38
pads on no net: D1.1 P7.1 P7.3 Q1.4 Q2.4 U1.33 U5.5 U5.6 U5.7 U5.12 U5.13 U5.14

## Polygon pours and split planes (outlines as drawn)
GND on Bottom Layer "GND" (solid, pour order 0): 250,0 0,250 0,4250 250,4500 4010,4500 4250,4260 4250,250 4000,0

## Silkscreen, mask and mechanical layers (free items; w line width, h text height)
Bottom Overlay:
  drawing of 8 lines, arcs and shapes, not listed
Mechanical 1:
  the board outline again, w10

## Text inside footprints (layer, text, board x,y; h text height)
C1: Top Overlay "+" at 409.01,913.69 h59.06 r90
C3: Top Overlay "+" at 759.01,2440.15 h59.06 r90
C5: Top Overlay "+" at 409.01,1750.15 h59.06 r90
J1: Top Overlay "1" at 1925,4075 h50; Mechanical 13 "10" at 2456.3,4171.06 h50; Mechanical 13 "1" at 1925,4075 h50